# Altium PCB APM32F103RCT6核心板PCB图纸.PcbDoc
Units mil, origin at the board's own origin, x right, y up, seen from the top; angles counter-clockwise.
Board outline 1520 x 1520 mil, 2 copper layers (Top Layer, Bottom Layer); 38 components, 65 nets, 207 pads, 0 vias.
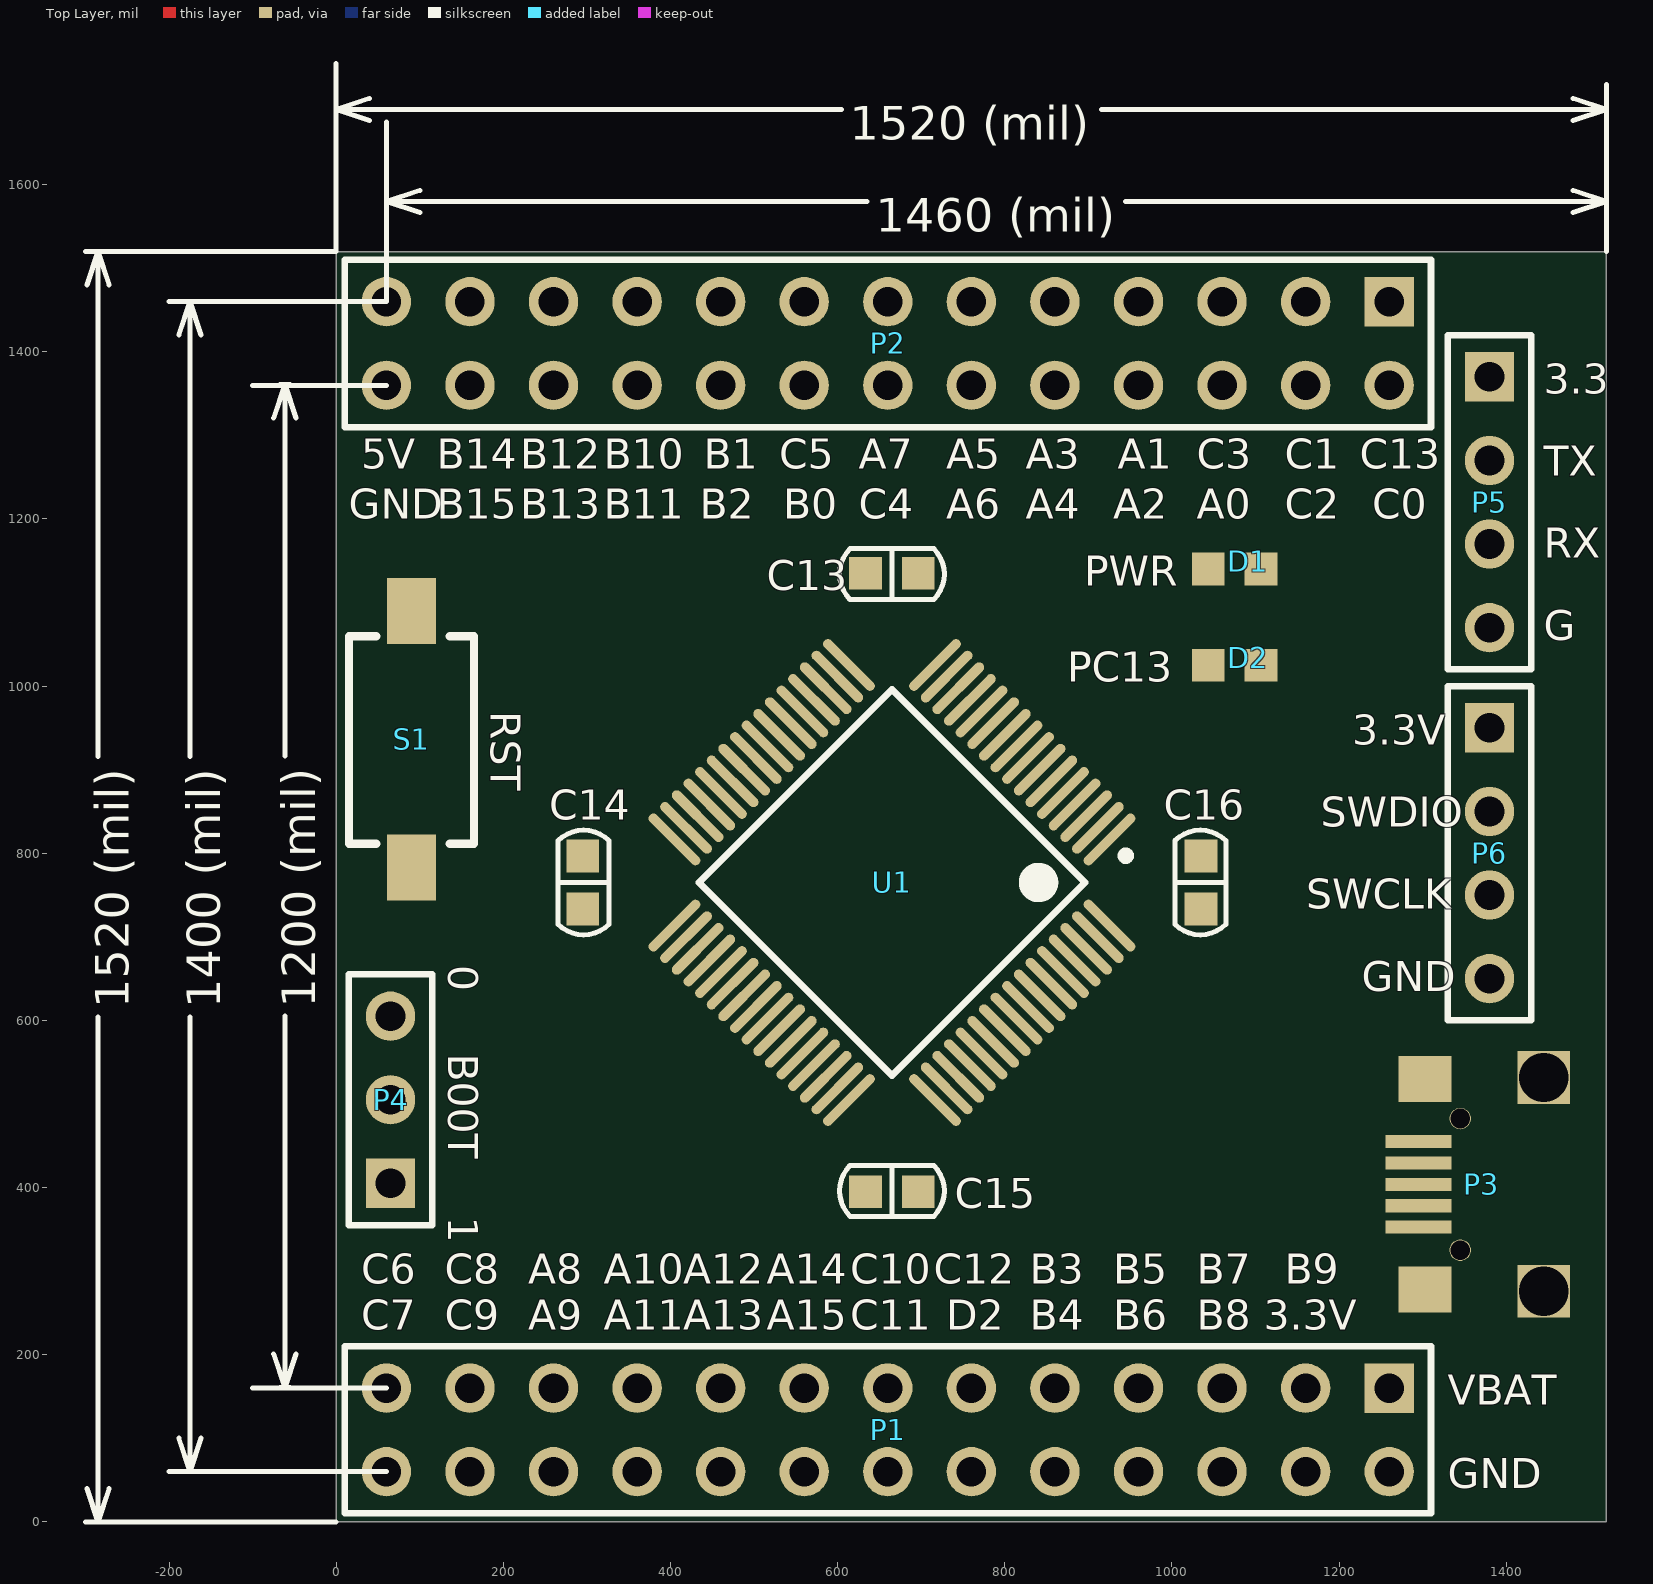
[diagram p0: Top Layer view]
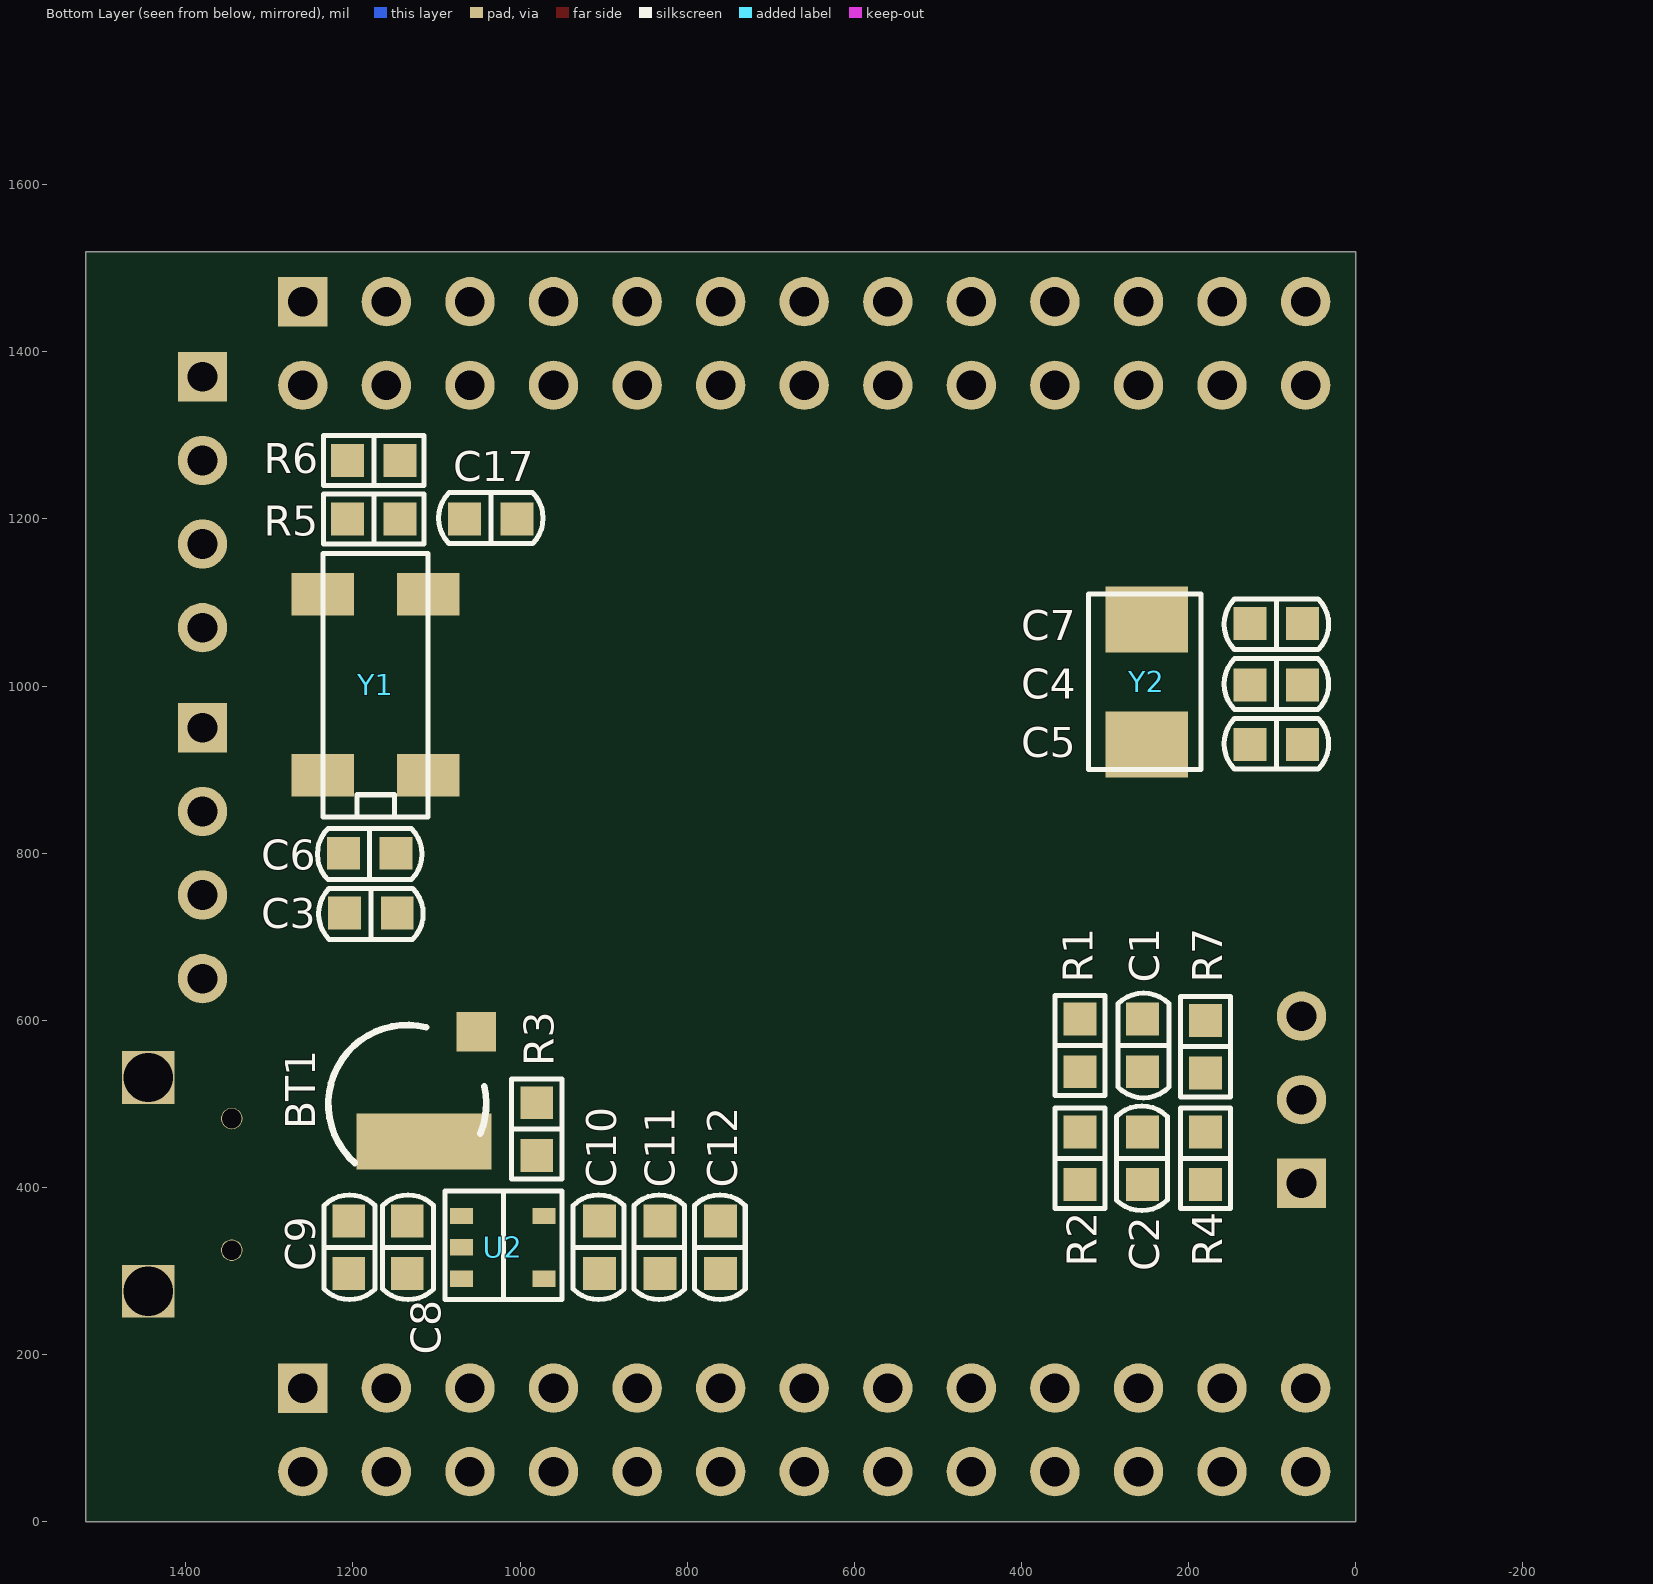
[diagram p1: Bottom Layer view, seen from below]

## Layer stack, top to bottom
Top Solder: solder mask 0.4, Solder Resist, Dk 3.5
Top Layer: signal copper 1.4
Dielectric 1: dielectric 12.6, FR-4, Dk 4.8
Bottom Layer: signal copper 1.4
Bottom Solder: solder mask 0.4, Solder Resist, Dk 3.5

## Board outline
0,0 1520,0 1520,1520 0,1520

## Design rules (kind name [scope] priority, off if disabled: settings)
Clearance [All] p1: gap=6
ComponentClearance [All] p1: gap=0 collisioncheckmode=3 verticalgap=0 showdistances=FALSE
PolygonConnect [All] p1: connectstyle=Relief reliefconductorwidth=10 reliefentries=4 polygonreliefangle="90 Angle" airgapwidth=10
RoutingVias [All] p1: holewidth=28 width=50 viastyle="Through Hole" minholewidth=28 minwidth=50 maxholewidth=28 maxwidth=50
SolderMaskExpansion [All] p1: expansion=4
Width [All] p1: maxlimit=100 minlimit=6 preferedwidth=10
29 further rules are at their usual default settings.

## Classes and differential pairs
component class Sheet1: BT1 C5 C6 C7 C8 C9 C10 C11 C12 C13 C14 C15 C16 C17 D1 D2 P1 P2 P3 P4 P5 P6 R5 R6 R7 U1 U2 Y1 Y2

## Components (designator, comment, footprint, x,y, rotation, side; value= is the part's Value field where it differs from the comment)
BT1 "XH414" XH414 1135,500 r180 bottom
C1 "Cap 0603" R0603-R/C-Y 255,570 r270 bottom
C2 "Cap 0603" R0603-R/C-Y 255,435 r90 bottom
C3 "Cap 0603" R0603-R/C-Y 1178.5,728.5 r0 bottom
C4 "Cap 0603" R0603-R/C-Y 95,1001.5 r180 bottom
C5 "Cap 0603" R0603-R/C-Y 95,930 r180 bottom
C6 "Cap 0603" R0603-R/C-Y 1180,800 r0 bottom
C7 "Cap 0603" R0603-R/C-Y 95,1075 r0 bottom
C8 "Cap 0603" R0603-R/C-Y 1135,328.5 r270 bottom
C9 "Cap 0603" R0603-R/C-Y 1205,328.5 r270 bottom
C10 "Cap 0603" R0603-R/C-Y 905,328.5 r90 bottom
C11 "Cap 0603" R0603-R/C-Y 832.5,328.5 r90 bottom
C12 "Cap 0603" R0603-R/C-Y 760,328.5 r90 bottom
C13 "Cap 0603" R0603-R/C-Y 665,1135 r180 top
C14 "Cap 0603" R0603-R/C-Y 295,765 r270 top
C15 "Cap 0603" R0603-R/C-Y 665,395 r0 top
C16 "Cap 0603" R0603-R/C-Y 1035,765 r90 top
C17 "Cap 0603" R0603-R/C-Y 1035,1200 r180 bottom
D1 "LED 0603" 0603-LED-G 1075,1140 r0 top
D2 "LED 0603" 0603-LED-G 1075,1025 r0 top
P1 "Header 13X2" HDR2X13 1260,160 r180 top
P2 "Header 13X2" HDR2X13 1260,1460 r180 top
P3 "USB-Micro" "USB Micro" 1295,403.74 r270 top
P4 "Header 3" HDR1X3 65,405 r90 top
P5 "Header 4" HDR1X4 1380,1370 r270 top
P6 "Header 4" HDR1X4 1380,950 r270 top
R1 "Res 0603" R0603-R/C-BY 330,570 r270 bottom
R2 "Res 0603" R0603-R/C-BY 330,435 r90 bottom
R3 "Res 0603" R0603-R/C-BY 980,470 r90 bottom
R4 "Res 0603" R0603-R/C-BY 180,435 r90 bottom
R5 "Res 0603" R0603-R/C-BY 1175,1200 r180 bottom
R6 "Res 0603" R0603-R/C-BY 1175,1270 r180 bottom
R7 "Res 0603" R0603-R/C-BY 180,568.5 r90 bottom
S1 "SW_PB" SW-2Pin 90,782.91 r90 top
U1 "STM32F103RCT6" STM-LQFP64_M 665,765 r225 top
U2 "ME6211C33M5G SOT-23-5" SOT-23-5 1070,365.9 r270 bottom
Y1 "XTAL_32.768K 8032" XTAL_8032 1110,893.46 r90 bottom
Y2 "8MHz, 5032" "XTAL 5032" 250,1005 r90 bottom

## Footprints (in the part's own frame and the unit in brackets; to place one, negate y for a bottom-side part, rotate by r counter-clockwise, add the part's x,y. Pads: shape width x height; smd on the part's side, far side on the other; paste and mask are expansions set on the pad)
0603-LED-G [mm]
  rect 1x1 smd: 1(-0.8,0) 2(0.8,0)
  round 0.2 on Top Overlay mask+0: 2(1.587,0.463)
  body extent -0.8,-0.39 0.85,0.33, height 0.68
HDR1X3 [mm] "Connector; Header; 3 Position"
  rect 1.5x1.5 hole 0.9: 1(0,0)
  round 1.5 hole 0.9: 2(2.54,0) 3(5.08,0)
  silkscreen extent -1.27,-1.27 6.35,1.27
HDR1X4 [mm] "Connector; Header; 4 Position"
  rect 1.5x1.5 hole 0.9: 1(0,0)
  round 1.5 hole 0.9: 2(2.54,0) 3(5.08,0) 4(7.62,0)
  silkscreen extent -1.27,-1.27 8.89,1.27
HDR2X13 [mm] "Connector; Header; 13x2 Position"
  rect 1.5x1.5 hole 0.9: 1(0,0)
  round 1.5 hole 0.9: 2(0,2.54) 3(2.54,0) 4(2.54,2.54) 5(5.08,0) 6(5.08,2.54) 7(7.62,0) 8(7.62,2.54) 9(10.16,0) 10(10.16,2.54) 11(12.7,0) 12(12.7,2.54) 13(15.24,0) 14(15.24,2.54) 15(17.78,0) 16(17.78,2.54) 17(20.32,0) 18(20.32,2.54) 19(22.86,0) 20(22.86,2.54) 21(25.4,0) 22(25.4,2.54) 23(27.94,0) 24(27.94,2.54) 25(30.48,0) 26(30.48,2.54)
  silkscreen extent -1.27,-1.27 31.75,3.81
R0603-R/C-BY [mm]
  rect 1x1 smd: 1(-0.8,0) 2(0.8,0)
  silkscreen extent -1.52,-0.76 1.52,0.76, body extent -0.97,-0.36 1.03,0.43, height 0.79
R0603-R/C-Y [mm]
  rect 1x1 smd: 1(-0.8,0) 2(0.8,0)
  silkscreen extent -1.59,-0.75 1.59,0.8, body extent -0.97,-0.36 1.03,0.43, height 0.79
SOT-23-5 [mm]
  rect 0.5x0.7 smd: 1(0,0) 2(0.95,0) 3(1.9,0) 4(1.9,2.5) 5(0,2.5)
  silkscreen extent -0.76,-0.51 2.54,3.05, body extent -0.61,0.02 2.39,2.52, height 1.05
STM-LQFP64_M [mm] "Thin QFP, 64-Leads, Body 10x10mm, Pitch 0.5mm, IPC Low Density"
  oval 2.1x0.3 smd: 1(-5.6,3.75) 2(-5.6,3.25) 3(-5.6,2.75) 4(-5.6,2.25) 5(-5.6,1.75) 6(-5.6,1.25) 7(-5.6,0.75) 8(-5.6,0.25) 9(-5.6,-0.25) 10(-5.6,-0.75) 11(-5.6,-1.25) 12(-5.6,-1.75) 13(-5.6,-2.25) 14(-5.6,-2.75) 15(-5.6,-3.25) 16(-5.6,-3.75) 33(5.6,-3.75) 34(5.6,-3.25) 35(5.6,-2.75) 36(5.6,-2.25) 37(5.6,-1.75) 38(5.6,-1.25) 39(5.6,-0.75) 40(5.6,-0.25) 41(5.6,0.25) 42(5.6,0.75) 43(5.6,1.25) 44(5.6,1.75) 45(5.6,2.25) 46(5.6,2.75) 47(5.6,3.25) 48(5.6,3.75)
  oval 0.3x2.1 smd: 17(-3.75,-5.6) 18(-3.25,-5.6) 19(-2.75,-5.6) 20(-2.25,-5.6) 21(-1.75,-5.6) 22(-1.25,-5.6) 23(-0.75,-5.6) 24(-0.25,-5.6) 25(0.25,-5.6) 26(0.75,-5.6) 27(1.25,-5.6) 28(1.75,-5.6) 29(2.25,-5.6) 30(2.75,-5.6) 31(3.25,-5.6) 32(3.75,-5.6) 49(3.75,5.6) 50(3.25,5.6) 51(2.75,5.6) 52(2.25,5.6) 53(1.75,5.6) 54(1.25,5.6) 55(0.75,5.6) 56(0.25,5.6) 57(-0.25,5.6) 58(-0.75,5.6) 59(-1.25,5.6) 60(-1.75,5.6) 61(-2.25,5.6) 62(-2.75,5.6) 63(-3.25,5.6) 64(-3.75,5.6)
  silkscreen extent -5.72,-4.15 4.15,4.57, body extent -5,-5 5,5, height 1.6
SW-2Pin [mm]
  rect 2x1.5 smd: 1(0,0) 2(7.8,0)
  silkscreen extent 0.73,-1.9 7.03,1.9, body extent -0.06,-1.94 7.83,1.91, height 2.5
"USB Micro" [mm]
  rect 0.4x2 smd: 1(-1.3,0) 2(-0.65,0) 3(0,0) 4(0.65,0) 5(1.3,0)
  rect 1.6x1.6 hole 1.5: ""(-3.25,3.81) ""(3.25,3.81)
  rect 1.4x1.6 smd: ""(-3.2,0.2) ""(3.2,0.2)
  round 0.65 hole 0.6 unplated: ""(-2,1.27) ""(2,1.27)
  body extent -4.4,0.13 4.4,5.73, height 2.83
XH414 [mm]
  rect 1.2x1.2 smd: 1(2.1,2.2)
  rect 4.1x1.7 smd: 2(0.508,-1.143)
  silkscreen extent -2.4,-1.79 2.4,2.4, body extent -2.43,-2.29 2.69,2.84, height 1.6
"XTAL 5032" [mm]
  rect 2x2.5 smd: 1(-1.9,0) 2(1.9,0)
  silkscreen extent -2.67,-1.65 2.67,1.78, body extent -2.5,-1.55 2.5,1.65, height 1.2
XTAL_8032 [mm]
  rect 1.3x1.9 smd: 1(0,0) 2(5.5,0) 3(5.5,3.2) 4(0,3.2)
  silkscreen extent -1.27,0 6.73,3.2, body extent -0.76,-0.03 6.34,3.07, height 1.3

## Part data
BT1: library part Battery, "Multicell Battery"
C1 C2 C3 C4 C5 C6 C7 C8 C9 C10 C11 C12 C13 C14 C15 C16 C17: "Capacitor 0603"
P1 P2: "Header, 13-Pin, Dual row"
P4: "Header, 3-Pin"
P5 P6: "Header, 4-Pin"
R1 R2 R3 R4 R5 R6 R7: "Resistor 0603"
U1: "ARM Cortex-M3 32-bit MCU, 256 KB Flash, 48 KB Internal RAM, 51 I/Os, 64-pin LQFP, -40 to 85 degC, Tray"
U2: library part ME6211C33M5G
Y2: library part XTAL, "Crystal Oscillator"

## Nets (pads, with @x,y where several pads share a name; then routed paths per layer and width w, separated by ;. In a path a pad name is that pad's centre, name@x,y a point inside that pad or via, vN(x,y) a via of type N, cw(c..) or ccw(c..) an arc to the next point about the centre after c; other vN are vias at no path point)
BOOT0: 
GND: 
NetBT1_1: 
NetC10_2: 
NetD1_1: 
NetD2_1: 
NetP4_1: 
NetP4_3: 
OSC_IN: 
OSC_OUT: 
PA0: 
PA1: 
PA2: 
PA3: 
PA4: 
PA5: 
PA6: 
PA7: 
PA8: 
PA9: 
PA10: 
PA11: 
PA12: 
PA13: 
PA14: 
PA15: 
PB0: 
PB1: 
PB2: 
PB3: 
PB4: 
PB5: 
PB6: 
PB7: 
PB8: 
PB9: 
PB10: 
PB11: 
PB12: 
PB13: 
PB14: 
PB15: 
PC0: 
PC1: 
PC2: 
PC3: 
PC4: 
PC5: 
PC6: 
PC7: 
PC8: 
PC9: 
PC10: 
PC11: 
PC12: 
PC13: 
PC14: 
PC15: 
PD2: 
RST: 
VBAT: 
VCAP1: 
VCAP2: 
VCC_3V3: 
VCC_5V: 
pads on no net: BT1.1 BT1.2 C1.1 C1.2 C2.1 C2.2 C3.1 C3.2 C4.1 C4.2 C5.1 C5.2 C6.1 C6.2 C7.1 C7.2 C8.1 C8.2 C9.1 C9.2 C10.1 C10.2 C11.1 C11.2 C12.1 C12.2 C13.1 C13.2 C14.1 C14.2 C15.1 C15.2 C16.1 C16.2 C17.1 C17.2 D1.1 D1.2 D2.1 D2.2 P1.1 P1.2 P1.3 P1.4 P1.5 P1.6 P1.7 P1.8 P1.9 P1.10 P1.11 P1.12 P1.13 P1.14 P1.15 P1.16 P1.17 P1.18 P1.19 P1.20 P1.21 P1.22 P1.23 P1.24 P1.25 P1.26 P2.1 P2.2 P2.3 P2.4 P2.5 P2.6 P2.7 P2.8 P2.9 P2.10 P2.11 P2.12 P2.13 P2.14 P2.15 P2.16 P2.17 P2.18 P2.19 P2.20 P2.21 P2.22 P2.23 P2.24 P2.25 P2.26 P3. P3.1 P3.2 P3.3 P3.4 P3.5 P4.1 P4.2 P4.3 P5.1 P5.2 P5.3 P5.4 P6.1 P6.2 P6.3 P6.4 R1.1 R1.2 R2.1 R2.2 R3.1 R3.2 R4.1 R4.2 R5.1 R5.2 R6.1 R6.2 R7.1 R7.2 S1.1 S1.2 U1.1 U1.2 U1.3 U1.4 U1.5 U1.6 U1.7 U1.8 U1.9 U1.10 U1.11 U1.12 U1.13 U1.14 U1.15 U1.16 U1.17 U1.18 U1.19 U1.20 U1.21 U1.22 U1.23 U1.24 U1.25 U1.26 U1.27 U1.28 U1.29 U1.30 U1.31 U1.32 U1.33 U1.34 U1.35 U1.36 U1.37 U1.38 U1.39 U1.40 U1.41 U1.42 U1.43 U1.44 U1.45 U1.46 U1.47 U1.48 U1.49 U1.50 U1.51 U1.52 U1.53 U1.54 U1.55 U1.56 U1.57 U1.58 U1.59 U1.60 U1.61 U1.62 U1.63 U1.64 U2.1 U2.2 U2.3 U2.4 U2.5 Y1.1 Y1.2 Y1.3 Y1.4 Y2.1 Y2.2

## Silkscreen, mask and mechanical layers (free items; w line width, h text height)
Top Overlay:
  lines w6: -300,0 0,0 ; -300,1520 0,1520 0,1635 ; -298.33,40 -285,0 ; -298.33,1480 -285,1520 ; -291,0 -279,0 ; -291,1520 -279,1520 ; -285,604.32 -285,0 ; -285,915.68 -285,1520 ; -271.67,40 -285,0 ; -271.67,1480 -285,1520 ; -200,60 60,60 ; -200,1460 60,1460 60,1675 ; -188.33,100 -175,60 ; -188.33,1420 -175,1460 ; -181,60 -169,60 ; -181,1460 -169,1460 ; -175,604.32 -175,60 ; -175,915.68 -175,1460 ; -161.67,100 -175,60 ; -161.67,1420 -175,1460 ; -100,160 60,160 ; -100,1360 60,1360 ; -74.8,200.68 -61.47,160.68 ; -74.8,1320.68 -61.47,1360.68 ; -67.47,160.68 -55.47,160.68 ; -67.47,1360.68 -55.47,1360.68 ; -61.47,605 -61.47,160.68 ; -61.47,916.37 -61.47,1360.68 ; -48.14,200.68 -61.47,160.68 ; -48.14,1320.68 -61.47,1360.68 ; 0,1620 0,1745 ; 0,1684 0,1696 ; 40,1676.67 0,1690 ; 40,1703.33 0,1690 ; 60,1574 60,1586 ; 100,1566.67 60,1580 ; 100,1593.33 60,1580 ; 604.32,1690 0,1690 ; 635.36,1580 60,1580 ; 915.68,1690 1520,1690 ; 944.64,1580 1520,1580 ; 1480,1566.67 1520,1580 ; 1480,1593.33 1520,1580 ; 1480,1676.67 1520,1690 ; 1480,1703.33 1520,1690 ; 1520,1520 1520,1720 ; 1520,1574 1520,1586 ; 1520,1684 1520,1696
  text "1520 (mil)" at 614.32,1653.53 h40
  text "1460 (mil)" at 645.36,1543.53 h40
  text "3.3" at 1445,1350 h36
  text "5V" at 30,1260 h36
  text "B14" at 120,1260 h36
  text "B12" at 220,1260 h36
  text "B10" at 320,1260 h36
  text "B1" at 440,1260 h36
  text "C5" at 530,1260 h36
  text "A7" at 625,1260 h36
  text "A5" at 730,1260 h36
  text "A3" at 825,1260 h36
  text "A1" at 935,1260 h36
  text "C3" at 1030,1260 h36
  text "C1" at 1135,1260 h36
  text "C13" at 1225,1260 h36
  text "TX" at 1445,1251.67 h36
  text "GND" at 15,1200 h36
  text "B15" at 120,1200 h36
  text "B13" at 220,1200 h36
  text "B11" at 320,1200 h36
  text "B2" at 435,1200 h36
  text "B0" at 535,1200 h36
  text "C4" at 625,1200 h36
  text "A6" at 730,1200 h36
  text "A4" at 825,1200 h36
  text "A2" at 930,1200 h36
  text "A0" at 1030,1200 h36
  text "C2" at 1135,1200 h36
  text "C0" at 1240,1200 h36
  text "RX" at 1445,1153.33 h36
  text "PWR" at 895,1120 h36
  text "G" at 1445,1055 h36
  text "PC13" at 875,1005 h36
  text "RST" at 185,970 h36 r270
  text "3.3V" at 1216.04,930 h36
  text "SWDIO" at 1178.33,831.67 h36
  text "SWCLK" at 1161.02,733.33 h36
  text "0" at 170,635 h36 r90
  text "GND" at 1227.01,635 h36
  text "1200 (mil)" at -25,615 h40 r90
  text "1520 (mil)" at -248.53,614.32 h40 r90
  text "1400 (mil)" at -138.53,614.32 h40 r90
  text "B00T" at 134.01,560 h36 r270
  text "1" at 134.01,365 h36 r270
  text "C6" at 30,285 h36
  text "C8" at 130,285 h36
  text "A8" at 230,285 h36
  text "A10" at 320,285 h36
  text "A12" at 415,285 h36
  text "A14" at 515,285 h36
  text "C10" at 615,285 h36
  text "C12" at 715,285 h36
  text "B3" at 830,285 h36
  text "B5" at 930,285 h36
  text "B7" at 1030,285 h36
  text "B9" at 1135,285 h36
  text "C7" at 30,230 h36
  text "C9" at 130,230 h36
  text "A9" at 230,230 h36
  text "A11" at 320,230 h36
  text "A13" at 415,230 h36
  text "A15" at 515,230 h36
  text "C11" at 615,230 h36
  text "D2" at 730,230 h36
  text "B4" at 830,230 h36
  text "B6" at 930,230 h36
  text "B8" at 1030,230 h36
  text "3.3V" at 1110,230 h36
  text "VBAT" at 1330,140 h36
  text "GND" at 1330,40 h36
Bottom Overlay:
  lines w6: 1150,843.46 1150,870 1195,870 1195,843.46
Mechanical 1:
  the board outline again, w6